# Altium PCB ADC_ArduinoDue_Shield.PcbDoc
Units mil, origin at the board's own origin, x right, y up, seen from the top; angles counter-clockwise.
Board outline 4010 x 2690 mil, 4 copper layers (Top Layer, PWR, GND, Bottom Layer), stack 21.709 mil thick; 29 components, 37 nets, 257 pads, 45 vias.
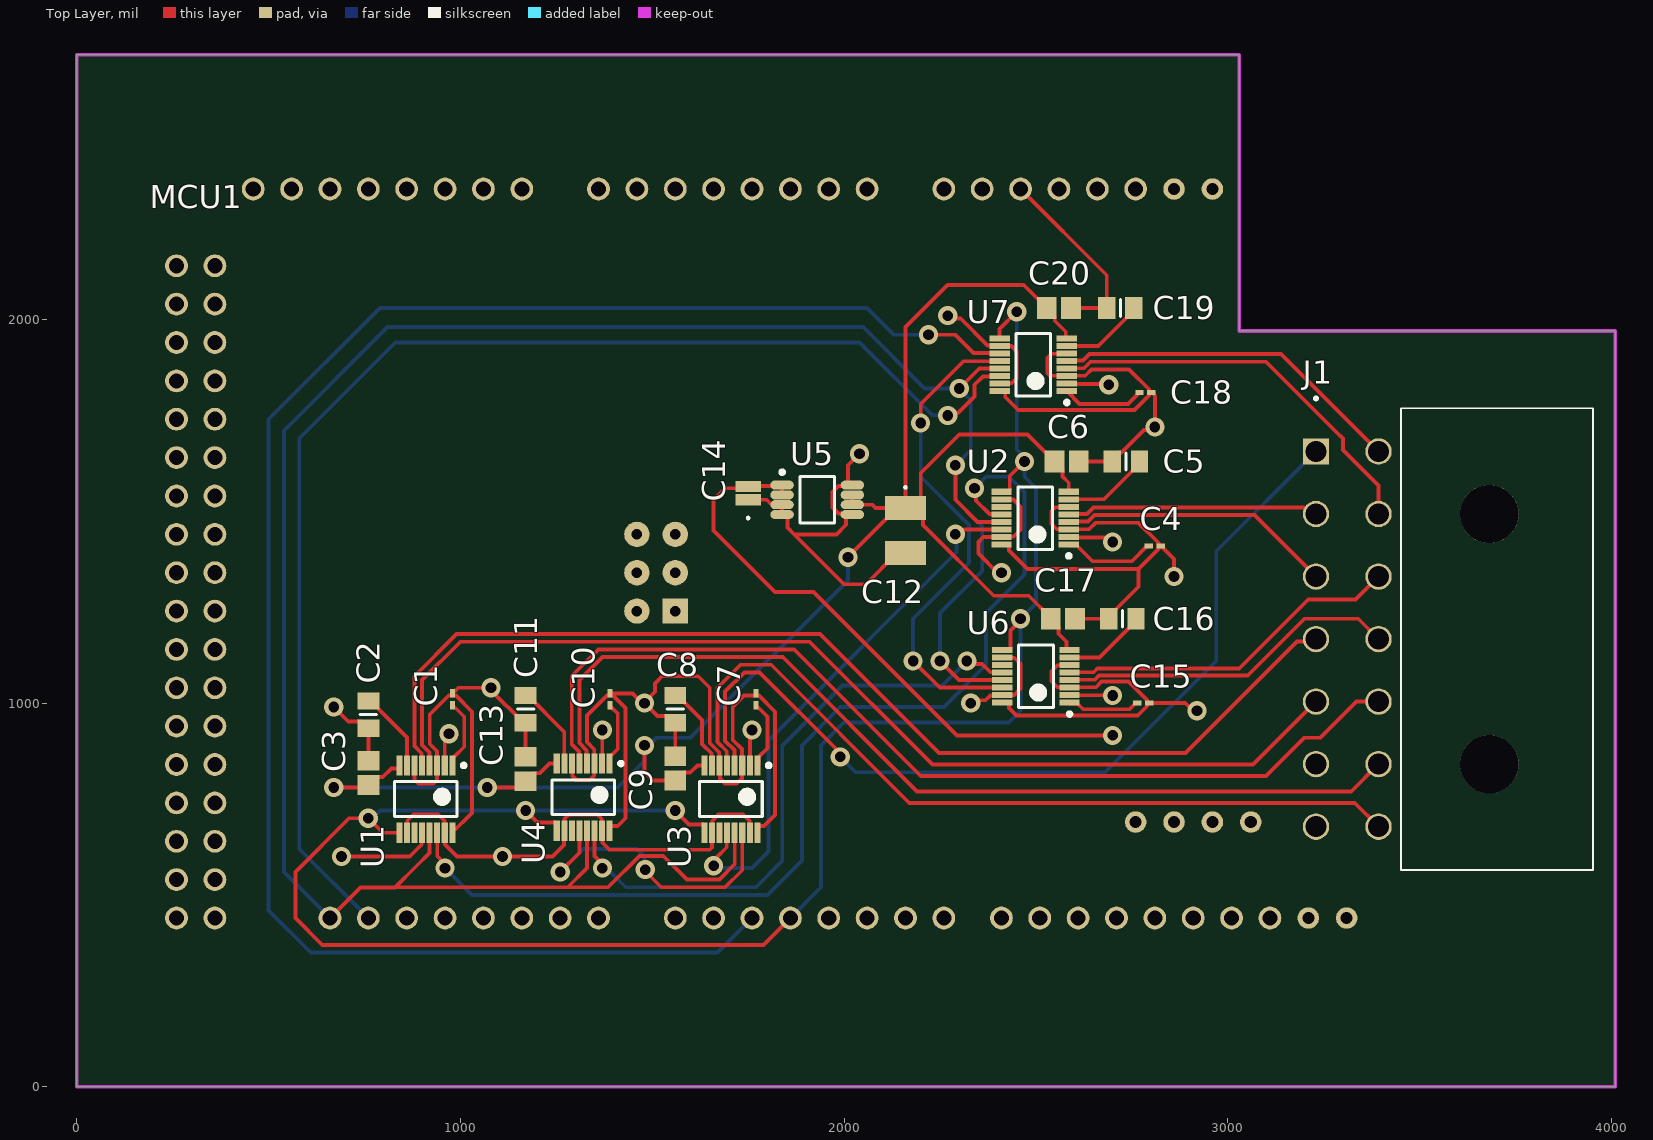
[diagram p0: Top Layer view]
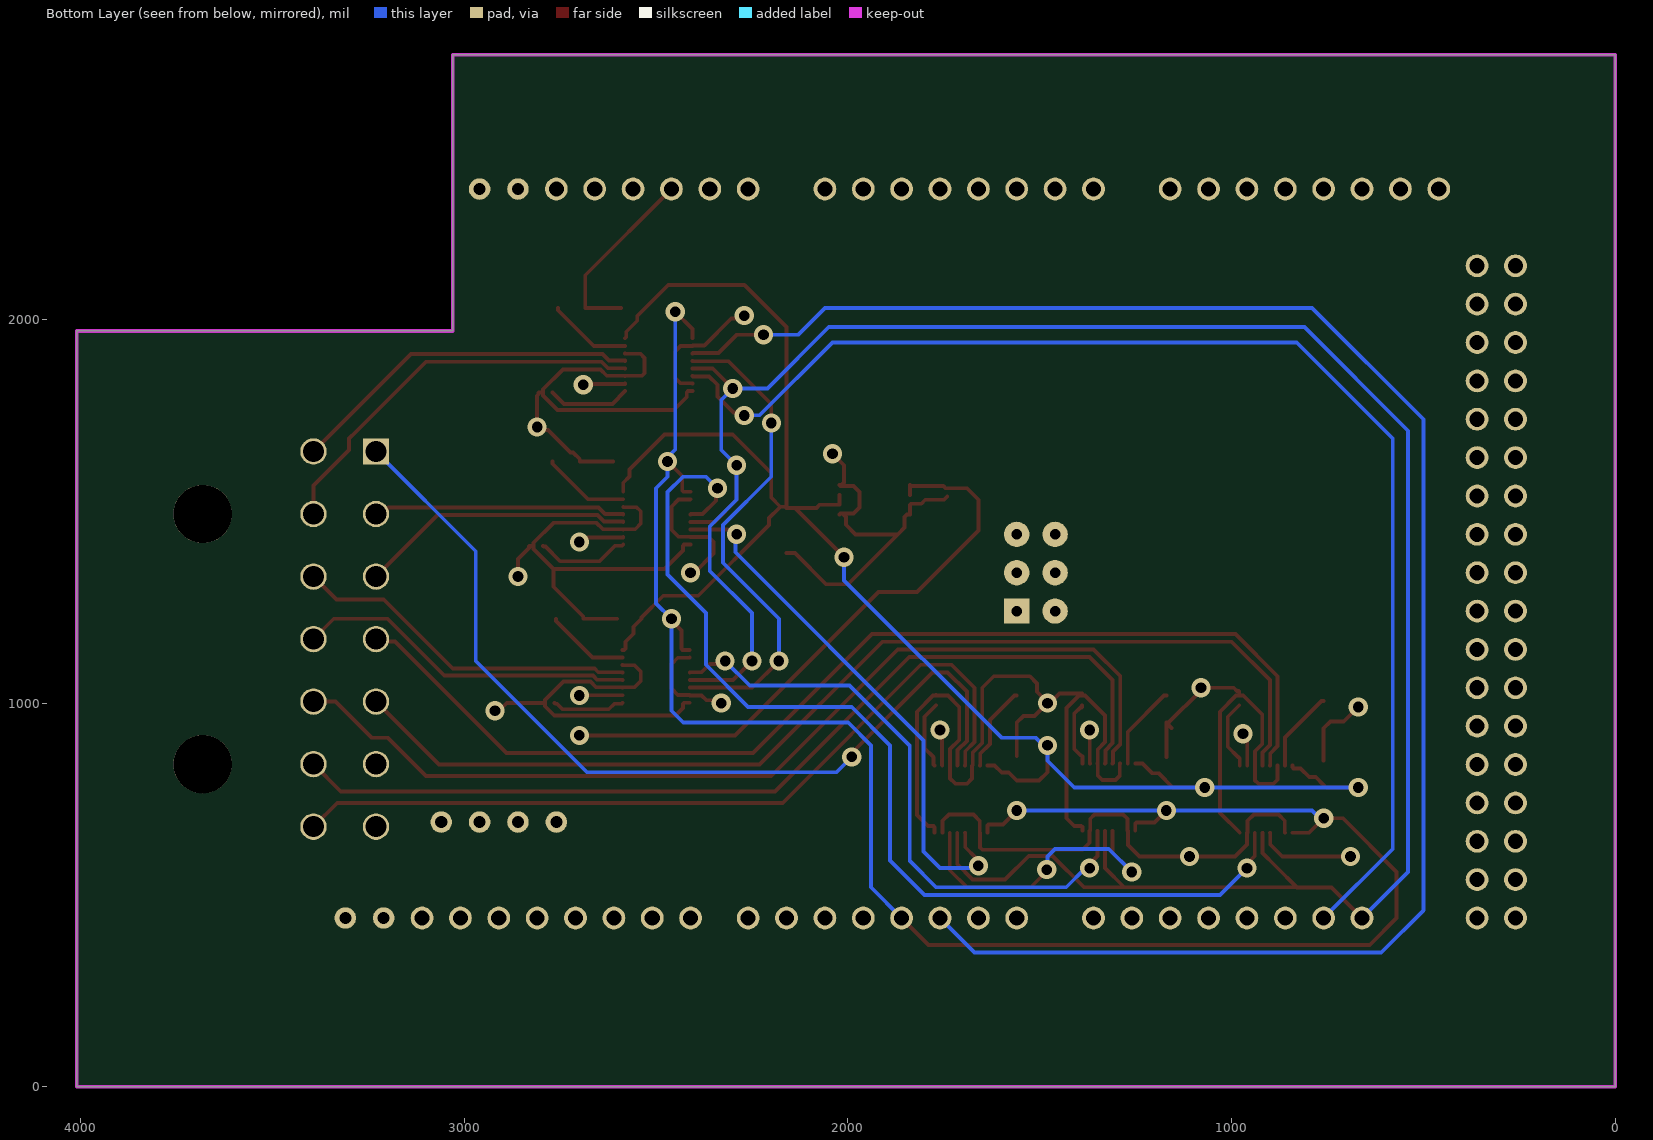
[diagram p1: Bottom Layer view, seen from below]
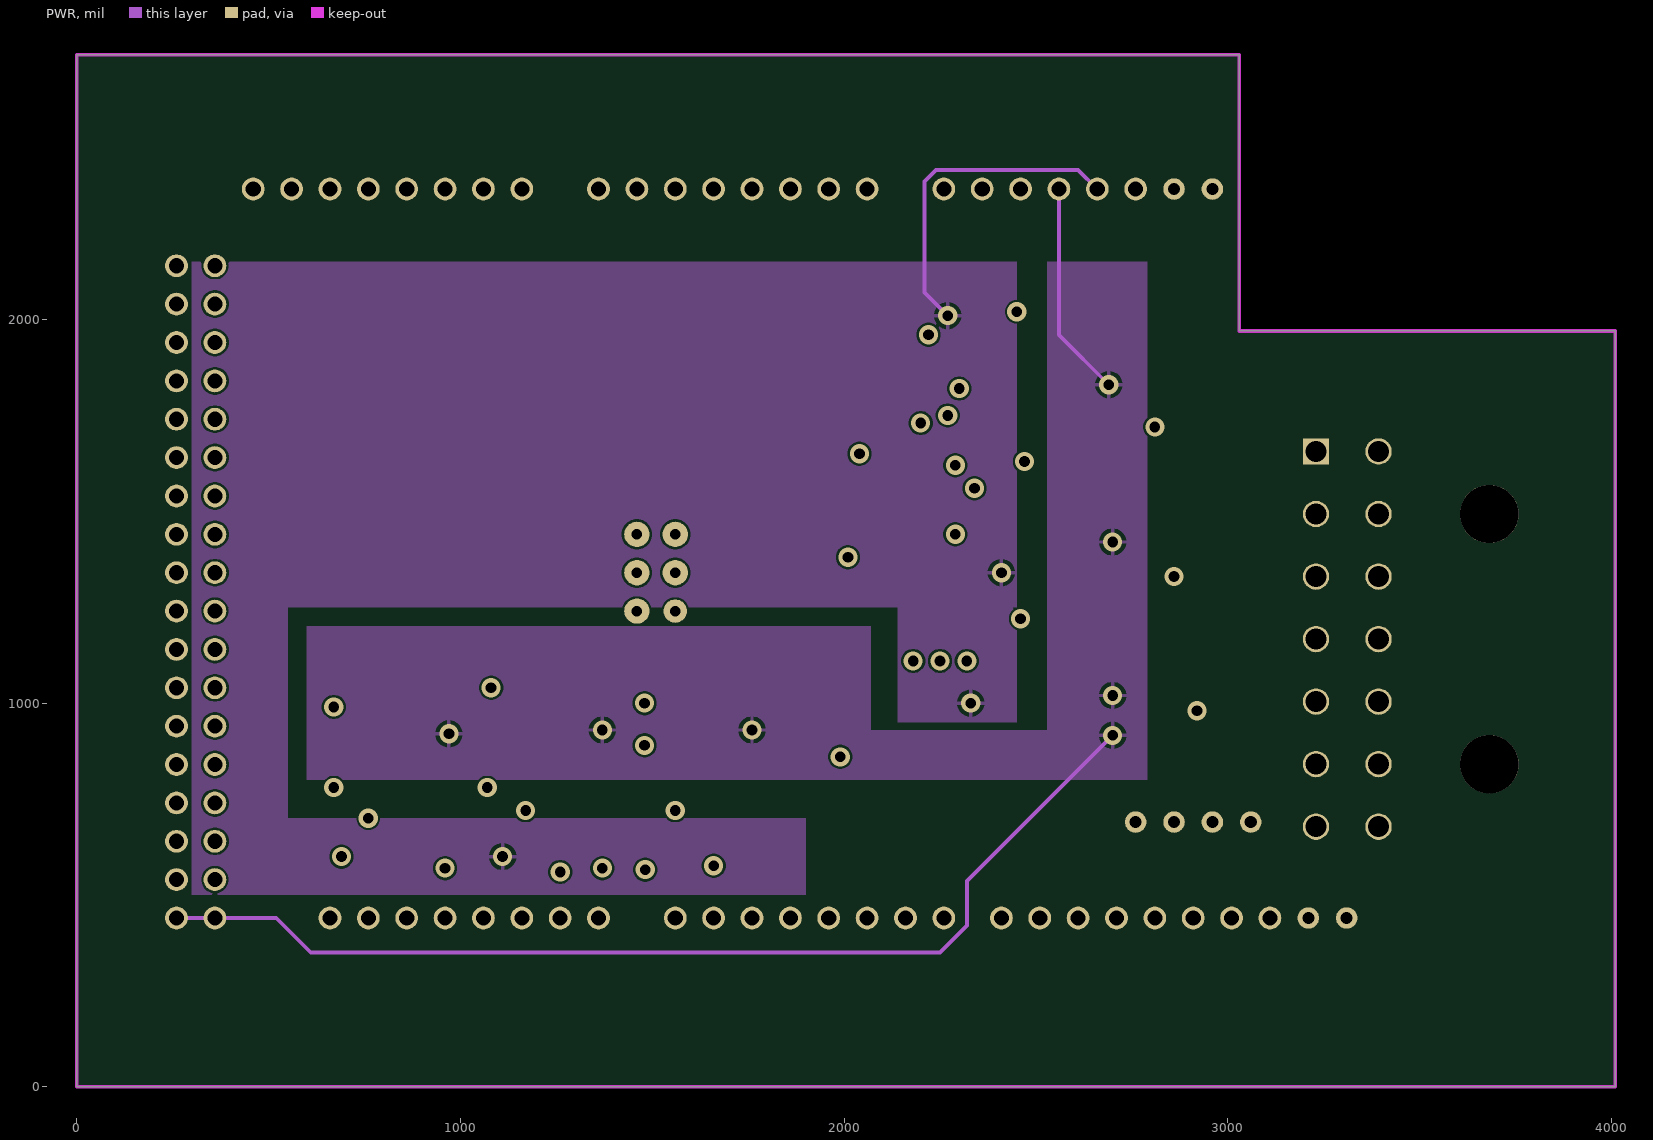
[diagram p2: PWR]
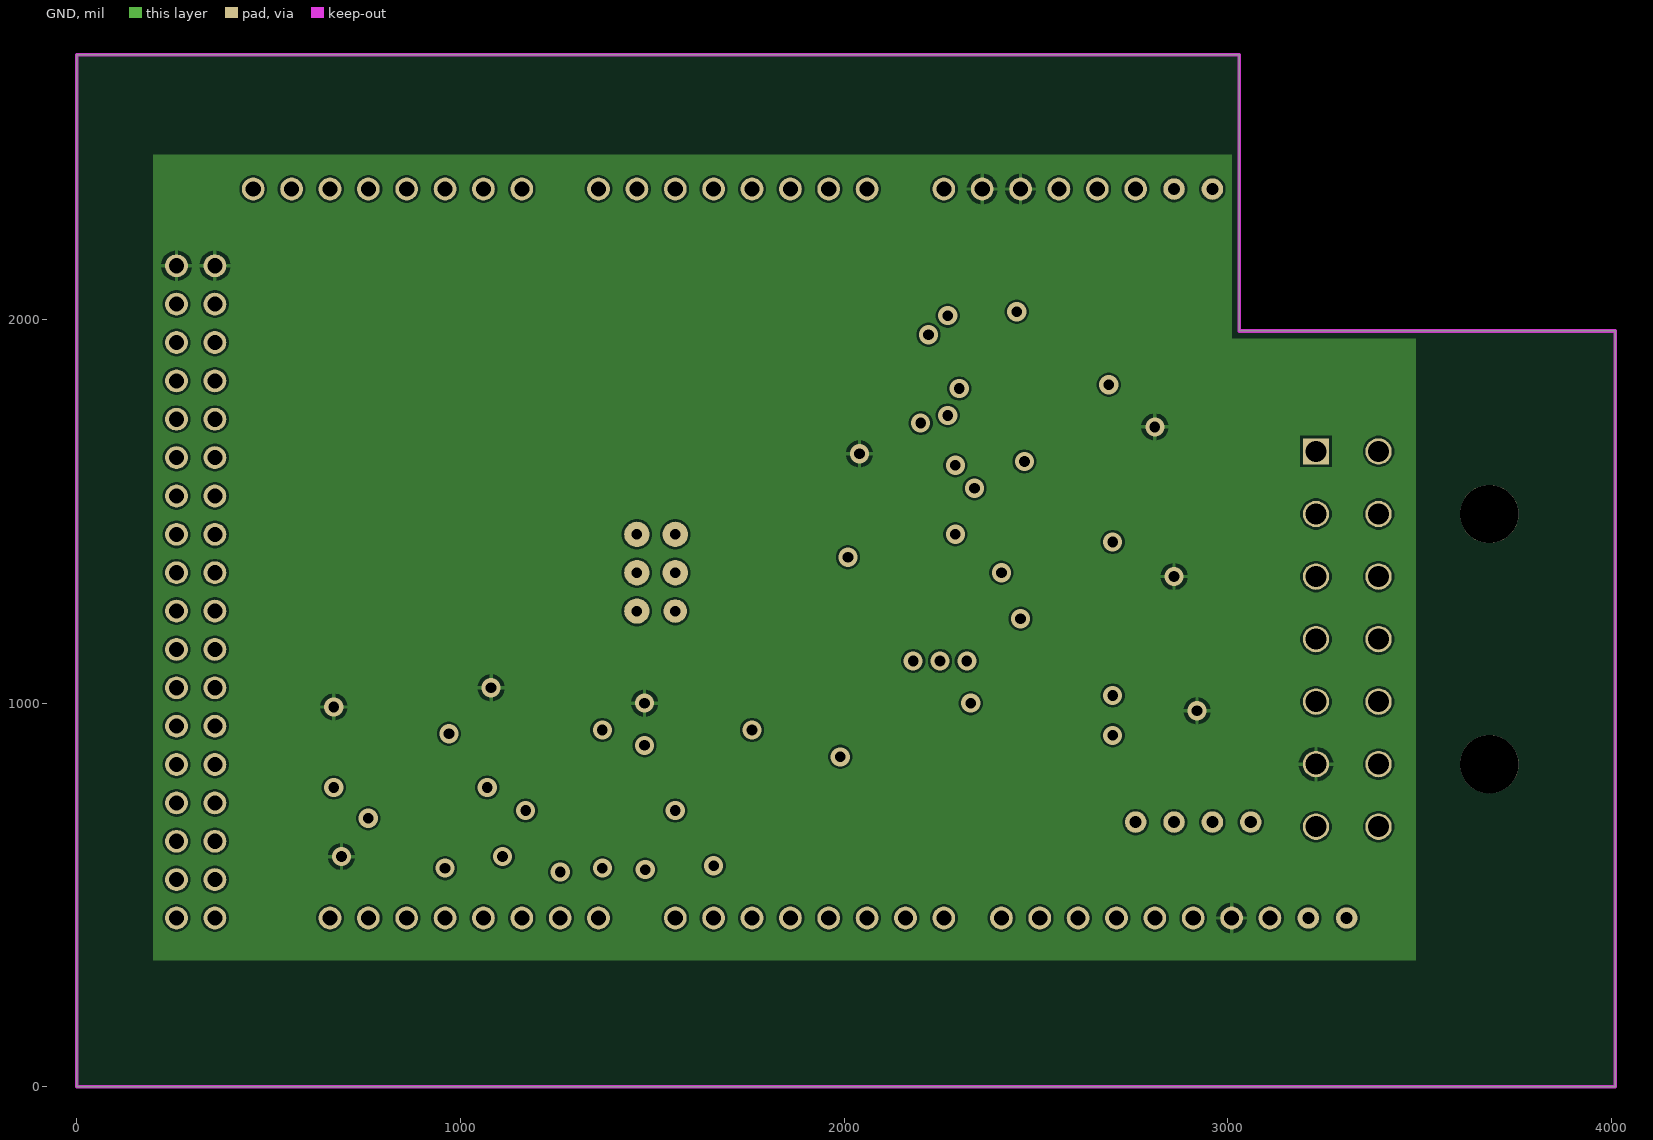
[diagram p3: GND]

## Layer stack, top to bottom
Top Solder: solder mask 0.4, Solder Resist, Dk 3.5
Top Layer: signal copper 1.4
Dielectric 2: prepreg 2.8, PP-006, Dk 4.1
PWR: signal copper 0.3543
Dielectric 1: dielectric 12.6, FR-4, Dk 4.8
GND: signal copper 0.3543
Dielectric 3: prepreg 2.8, PP-006, Dk 4.1
Bottom Layer: signal copper 1.4
Bottom Solder: solder mask 0.4, Solder Resist, Dk 3.5

## Board outline
0,0 4010,0 4010,1970 3030,1970 3030,2690 0,2690

## Design rules (kind name [scope] priority, off if disabled: settings)
Clearance [All] p1: gap=6 ignorepadtopadclearanceinfootprint=TRUE
ComponentClearance ComponentClearance_1 [InComponent('MCU1')] p1: gap=0 collisioncheckmode=3 verticalgap=0 showdistances=FALSE donotcheckwithout3dbody=TRUE
ComponentClearance [All] p2: gap=10 collisioncheckmode=3 verticalgap=10 showdistances=FALSE
PolygonConnect [All] p1: connectstyle=Relief reliefconductorwidth=10 reliefentries=4 polygonreliefangle="90 Angle" airgapwidth=10
RoutingVias [All] p1: holewidth=28 width=50 viastyle="Through Hole" minholewidth=28 minwidth=50 maxholewidth=28 maxwidth=50
SolderMaskExpansion [All] p1: expansion=4 istentingtop=FALSE
Width [All] p1: maxlimit=10 minlimit=10 preferedwidth=10
29 further rules are at their usual default settings.

## Components (designator, comment, footprint, x,y, rotation, side; value= is the part's Value field where it differs from the comment)
C1 "CL03A225MQ3CRNC" CAP_CL_03_SAM 980,1010 r270 top
C2 "CL21A476MQCLRNC" CAPC2012X140N 760,970 r270 top
C3 "C0805C275K8PACTU" CAPC220145_105N_KEM 760,818.39 r270 top
C4 "CL03A225MQ3CRNC" CAP_CL_03_SAM 2810,1410 r180 top
C5 "CL21A476MQCLRNC" CAPC2012X140N 2734.57,1630 r180 top
C6 "C0805C275K8PACTU" CAPC220145_105N_KEM 2580,1630 r180 top
C7 "CL03A225MQ3CRNC" CAP_CL_03_SAM 1770,1010 r270 top
C8 "CL21A476MQCLRNC" CAPC2012X140N 1560,984.57 r270 top
C9 "C0805C275K8PACTU" CAPC220145_105N_KEM 1560,830 r270 top
C10 "CL03A225MQ3CRNC" CAP_CL_03_SAM 1390,1010 r270 top
C11 "CL21A476MQCLRNC" CAPC2012X140N 1170,984.57 r270 top
C12 "25TQC5R6M" POSCAP_B1_B1S_B1G_B15G_B2_B2S 2160,1450 r270 top
C13 "C0805C275K8PACTU" CAPC220145_105N_KEM 1170,828.39 r270 top
C14 "AWK107BJ106MV-T" AWK107_0306_TAY 1750,1547.22 r90 top
C15 "CL03A225MQ3CRNC" CAP_CL_03_SAM 2780,1000 r180 top
C16 "CL21A476MQCLRNC" CAPC2012X140N 2725.43,1220 r180 top
C17 "C0805C275K8PACTU" CAPC220145_105N_KEM 2570,1220 r180 top
C18 "CL03A225MQ3CRNC" CAP_CL_03_SAM 2785.5,1810 r180 top
C19 "CL21A476MQCLRNC" CAPC2012X140N 2720,2030 r180 top
C20 "C0805C275K8PACTU" CAPC220145_105N_KEM 2560,2030 r180 top
J1 "Connector Header, 14-Position, 2 Rows, Male Pin" TE_1-770973-0 3230,1655.98 r90 top
MCU1 "DUE(NORMAL)" DUE(NORMAL) 1110,1640 r180 top locked
U1 "LTC2336HMS-18" TSSOP50P490X110-16N 910,750 r270 top
U2 "LTC2336HMS-18" TSSOP50P490X110-16N 2497.99,1482.05 r180 top
U3 "LTC2336HMS-18" TSSOP50P490X110-16N 1705,750 r270 top
U4 "LTC2336HMS-18" TSSOP50P490X110-16N 1320,755 r270 top
U5 "LTC6655CHMS8-1.25#PBF" TSOP65P490X110-8N 1930,1530 r0 top
U6 "LTC2336HMS-18" TSSOP50P490X110-16N 2500,1070 r180 top
U7 "LTC2336HMS-18" TSSOP50P490X110-16N 2492.99,1882.05 r180 top

## Footprints (in the part's own frame and the unit in brackets; to place one, negate y for a bottom-side part, rotate by r counter-clockwise, add the part's x,y. Pads: shape width x height; smd on the part's side, far side on the other; paste and mask are expansions set on the pad)
AWK107_0306_TAY [mil]
  rect 29x66.93 smd paste+0 mask+0: 1(-17.22,0) 2(17.22,0)
  silkscreen extent -68,-3 -62,3, body extent -18,-33 18,33, height 22
CAP_CL_03_SAM [mil]
  rect 22x13 smd paste+0 mask+0: 1(-15.5,0) 2(15.5,0)
  body extent -13,-6 13,6, height 13
CAPC2012X140N [mm]
  rect 1.15x1.45 smd: 1(-0.9,0) 2(0.9,0)
  silkscreen extent 0,-0.55 0,0.55
CAPC220145_105N_KEM [mm]
  rect 1.306x1.45 smd paste+0 mask+0: 1(-0.803,0) 2(0.803,0)
  body extent -1.1,-0.72 1.1,0.72, height 1.05
DUE(NORMAL) [mm]
  round 1.508 hole 1: 2(-16.51,30.48) 3(-19.05,30.48) 3V3(-39.37,-17.78) 4(-21.59,30.48) 5(-24.13,30.48) 5V(-36.83,-17.78) 5V_A(19.05,30.48) 5V_B(21.59,30.48) 6(-26.67,30.48) 7(-29.21,30.48) 8(-33.02,30.48) 9(-35.56,30.48) 10(-38.1,30.48) 11(-40.64,30.48) 12(-43.18,30.48) 13(-45.72,30.48) 22(19.05,27.94) 23(21.59,27.94) 24(19.05,25.4) 25(21.59,25.4) 26(19.05,22.86) 27(21.59,22.86) 28(19.05,20.32) 29(21.59,20.32) 30(19.05,17.78) 31(21.59,17.78) 32(19.05,15.24) 33(21.59,15.24) 34(19.05,12.7) 35(21.59,12.7) 36(19.05,10.16) 37(21.59,10.16) 38(19.05,7.62) 39(21.59,7.62) 40(19.05,5.08) 41(21.59,5.08) 42(19.05,2.54) 43(21.59,2.54) 44(19.05,0) 45(21.59,0) 46(19.05,-2.54) 47(21.59,-2.54) 48(19.05,-5.08) 49(21.59,-5.08) 50(19.05,-7.62) 51(21.59,-7.62) 52(19.05,-10.16) 53(21.59,-10.16) A0(-24.13,-17.78) A1(-21.59,-17.78) A2(-19.05,-17.78) A3(-16.51,-17.78) A4(-13.97,-17.78) A5(-11.43,-17.78) A6(-8.89,-17.78) A7(-6.35,-17.78) A8(-1.27,-17.78) A9(1.27,-17.78) A10(3.81,-17.78) A11(6.35,-17.78) AREF(-50.8,30.48) AREF1(-50.8,30.48) CANRX(13.97,-17.78) CANTX(16.51,-17.78) DAC0(8.89,-17.78) DAC1(11.43,-17.78) GND1(-48.26,30.48) GND_1(-34.29,-17.78) GND_2(-31.75,-17.78) GND_A(19.05,-12.7) GND_B(21.59,-12.7) RESET(-41.91,-17.78) RX0(-11.43,30.48) RX1(6.35,30.48) RX2(1.27,30.48) RX3(-3.81,30.48) SCL(11.43,30.48) SDA(8.89,30.48) TX0(-13.97,30.48) TX1(3.81,30.48) TX2(-1.27,30.48) TX3(-6.35,30.48) VIN(-29.21,-17.78)
  round 1.676 hole 0.7: 5V_ICSP(-8.89,5.08) GND_ICSP(-8.89,10.16) MOSI_ICSP(-8.89,7.62) RESET_ICSP(-11.43,5.08) SCK_ICSP(-11.43,7.62)
  round 1.422 hole 0.8: GND_DEBUG(-41.91,24.13) IOREF(-44.45,-17.78) NC(-46.99,-17.78) RESET_DEBUG(-49.53,24.13) SCL1(-55.88,30.48) SDA1(-53.34,30.48) SWCLK_DEBUG(-44.45,24.13) SWDIO_DEBUG(-46.99,24.13)
  rect 1.676x1.676 / inner round 1.549 / far side rect 1.676x1.676 hole 0.7: MISO_ICSP(-11.43,10.16)
POSCAP_B1_B1S_B1G_B15G_B2_B2S [mm]
  rect 1.6x2.7 smd: 1(-1.5,0) 2(1.5,0)
  silkscreen extent -2.9,-0.05 -2.8,0.05, body extent -1.75,-1.4 1.75,1.4, height 1.88
TE_1-770973-0 [mm]
  rect 1.75x1.75 hole 1.4: 1(0,0)
  round 1.75 hole 1.4: 2(-4.14,0) 3(-8.28,0) 4(-12.42,0) 5(-16.56,0) 6(-20.7,0) 7(-24.84,0) 8(0,-4.14) 9(-4.14,-4.14) 10(-8.28,-4.14) 11(-12.42,-4.14) 12(-16.56,-4.14) 13(-20.7,-4.14) 14(-24.84,-4.14)
  round 3.86 hole 3.86 unplated: ""(-20.7,-11.48) ""(-4.14,-11.48)
  silkscreen extent -27.7,-18.34 3.61,0.1
TSOP65P490X110-8N [mm] "TSOP, 8-Leads, Body 3.00x3.00mm, Pitch 0.65mm, IPC Medium Density"
  oval 1.55x0.6 smd: 1(-2.325,0.975) 2(-2.325,0.325) 3(-2.325,-0.325) 4(-2.325,-0.975) 5(2.325,-0.975) 6(2.325,-0.325) 7(2.325,0.325) 8(2.325,0.975)
  silkscreen extent -2.45,-1.55 1.15,1.95, body extent -1.55,-1.55 1.55,1.55, height 1.1
TSSOP50P490X110-16N [mm] "TSSOP, 16-Leads, Body 4.04x3.00mm, Pitch 0.50mm, IPC Medium Density"
  rect 1.35x0.4 smd: 1(-2.225,1.75) 2(-2.225,1.25) 3(-2.225,0.75) 4(-2.225,0.25) 5(-2.225,-0.25) 6(-2.225,-0.75) 7(-2.225,-1.25) 8(-2.225,-1.75) 9(2.225,-1.75) 10(2.225,-1.25) 11(2.225,-0.75) 12(2.225,-0.25) 13(2.225,0.25) 14(2.225,0.75) 15(2.225,1.25) 16(2.225,1.75)
  silkscreen extent -2.35,-2.08 1.15,2.63, body extent -1.55,-2.05 1.55,2.05, height 1.1

## Part data
C1 C4 C7 C10 C15 C18: "CL03 Series 0201 2.2 uF 6.3 V X5R ±20% Tolerance Multilayer Ceramic Capacitor", Capacitance=2.2uF, Case Code (Imperial)=0201, Case Code (Metric)=0603, Dielectric=X5R, Manufacturer=Samsung, Max Operating Temperature=85°C, Min Operating Temperature=-55°C, Supplier Part Number 1=1276-6870-1-ND, Tolerance=20%, Voltage Rating=6.3V, Case/Package=0201, Category="Ceramic Capacitors", ComponentLink1Description=https://datasheet.ciiva.com/26838/getdatasheetpartid-745303-26838096.pdf?src-supplier=Verical, ComponentLink1URL=https://datasheet.ciiva.com/26838/getdatasheetpartid-745303-26838096.pdf?src-supplier=Verical, Construction=Flat, Copyright="Copyright (C) 2022 Ultra Librarian. All rights reserved.", Depth=0.3mm, Digi-Key_Part_Number_1=1276-6870-2-ND, Digi-Key_Part_Number_2=1276-6870-1-ND, Digi-Key_Part_Number_3=1276-6870-6-ND, Height=0.3mm, Length=0.6mm, Manufacturer Part Number=CL03A225MQ3CRNC, Manufacturer_Part_Number=CL03A225MQ3CRNC, Mfr_Name=Samsung, Mount="Surface Mount", Packaging="Tape and Reel", Pricing 1="1=0.27000, 10=0.18500, 50=0.11080, 100=0.09360, 500=0.06406, 1000=0.05667, 2500=0.05421, 5000=0.04928 (USD)", Pricing 2="1=0.27000, 10=0.18500, 50=0.11080, 100=0.09360, 500=0.06406, 1000=0.05667, 2500=0.05421, 5000=0.04928 (USD)", Pricing 3="10000=0.04682, 20000=0.04435 (USD)", Pricing 4="1=0.29000, 10=0.13300, 50=0.13300, 100=0.10000, 1000=0.06100, 10000=0.04900 (USD)", Radiation Hardening=No, RefDes=RefDes, RoHS=Yes, RoHS Compliant=Yes, Series=CL, Stock 1=667406, Stock 2=667406, Stock 3=650000, Stock 4=295762, Supplier 1=Digi-Key, Supplier 2=Digi-Key, Supplier 3=Digi-Key, Supplier 4=Mouser, Supplier Part Number 2=1276-6870-6-ND, Supplier Part Number 3=1276-6870-2-ND, Supplier Part Number 4=187-CL03A225MQ3CRNC, Thickness=0.013inch, Type=DEV, Width=0.012inch
C2 C5 C8 C11 C16 C19: "Cap Ceramic 47uF 6.3V X5R 20% SMD 0805 85°C Paper T/R", Capacitance=47uF, Case Code (Imperial)=0805, Case Code (Metric)=2012, Dielectric=X5R, Manufacturer=Samsung, Max Operating Temperature=85°C, Min Operating Temperature=-55°C, Package="0805 Samsung", Package Quantity=4000, Supplier Part Number 1=1276-2420-1-ND, Tolerance=20%, Voltage Rating=6.3V, Availability=Unavailable, Case/Package=0805, Category="Ceramic Capacitors", ComponentLink1Description=https://datasheet.ciiva.com/25723/cl21a476mqclrnc-25723991.pdf?src-supplier=Digi-Key, ComponentLink1URL=https://datasheet.ciiva.com/25723/cl21a476mqclrnc-25723991.pdf?src-supplier=Digi-Key, Construction=Flat, Contact Plating=Tin, Depth=1.25mm, DigiKey-Purchase-URL=https://snapeda.com/shop?store=DigiKey&id=3598165, Lead Free="Lead Free", Length=2mm, Manufacturer Part Number=CL21A476MQCLRNC, MF=Samsung, Mount="Surface Mount", MP=CL21A476MQCLRNC, Packaging="Tape and Reel", Price=None, Pricing 1="1=0.49000, 10=0.34100, 50=0.23900, 100=0.20480, 500=0.15362, 1000=0.12973 (USD)", Pricing 2="1=0.49000, 10=0.34100, 50=0.23900, 100=0.20480, 500=0.15362, 1000=0.12973 (USD)", Pricing 3="4000=0.11607, 8000=0.10924 (USD)", Pricing 4="1=0.50000, 10=0.28500, 50=0.28500, 100=0.21700, 1000=0.13700, 10000=0.10800 (USD)", RoHS=Yes, RoHS Compliant=Yes, Series=CL, SnapEDA_Link=https://www.snapeda.com/parts/CL21A476MQCLRNC/Samsung/view-part/3598165/?ref=snap, Stock 1=98057, Stock 2=98057, Stock 3=98057, Stock 4=323, Supplier 1=Digi-Key, Supplier 2=Digi-Key, Supplier 3=Digi-Key, Supplier 4=Mouser, Supplier Part Number 2=1276-2420-6-ND, Supplier Part Number 3=1276-2420-2-ND, Supplier Part Number 4=187-CL21A476MQCLRNC, Termination=Wraparound, Thickness=0.037inch, Width=0.049inch
C3 C6 C9 C13 C17 C20: "0805 C 2.7uF Ceramic Multilayer Capacitor; 10 VDC; +85degC; X5R Dielec; +/-10%", Capacitance=2.7uF, Case Code (Imperial)=0805, Case Code (Metric)=2012, Dielectric=X5R, Dielectric Material=Ceramic, Manufacturer=KEMET, Max Operating Temperature=85°C, Mfr_Name=Kemet, Min Operating Temperature=-55°C, Package Quantity=1, Supplier Part Number 1=399-C0805C275K8PAC7800CT-ND, Tolerance=10%, Voltage=10V, Case/Package=0805, Category="Ceramic Capacitors", ComponentLink1Description=http://www.mouser.com/ds/2/212/KEM_C1006_X5R_SMD-1103249.pdf?src-supplier=Mouser, ComponentLink1URL=http://www.mouser.com/ds/2/212/KEM_C1006_X5R_SMD-1103249.pdf?src-supplier=Mouser, ComponentLink2Description=http://components.arrow.com/part/dataview/40912422S7467711N7429?src-supplier=Arrow+Electronics, ComponentLink2URL=http://components.arrow.com/part/dataview/40912422S7467711N7429?src-supplier=Arrow+Electronics, ComponentLink3Description=http://uk.rs-online.com/webdocs/13da/0900766b813da6d7.pdf?src-supplier=RSComponents, ComponentLink3URL=http://uk.rs-online.com/webdocs/13da/0900766b813da6d7.pdf?src-supplier=RSComponents, ComponentLink4Description=http://uk.rs-online.com/webdocs/13da/0900766b813da6d8.pdf?src-supplier=RSComponents, ComponentLink4URL=http://uk.rs-online.com/webdocs/13da/0900766b813da6d8.pdf?src-supplier=RSComponents, ComponentLink5Description=https://www.alliedelec.com/m/d/7f88201dbaab65c95b0b8234579261a3.pdf?src-supplier=Allied+Electronics, ComponentLink5URL=https://www.alliedelec.com/m/d/7f88201dbaab65c95b0b8234579261a3.pdf?src-supplier=Allied+Electronics, ComponentLink6Description=https://www.alliedelec.com/m/d/fc0aaf5de6140bfa85cbf42aaccfae41.pdf?src-supplier=Allied+Electronics, ComponentLink6URL=https://www.alliedelec.com/m/d/fc0aaf5de6140bfa85cbf42aaccfae41.pdf?src-supplier=Allied+Electronics, ComponentLink7Description=https://search.kemet.com/component-edge/download/datasheet/C0805C275K8PACTU.pdf?src-supplier=Digi-Key, ComponentLink7URL=https://search.kemet.com/component-edge/download/datasheet/C0805C275K8PACTU.pdf?src-supplier=Digi-Key, ComponentLink8Description=https://api.kemet.com/component-edge/download/datasheet/C0805C275K8PACTU.pdf?src-supplier=Digi-Key, ComponentLink8URL=https://api.kemet.com/component-edge/download/datasheet/C0805C275K8PACTU.pdf?src-supplier=Digi-Key, ComponentLink9Description=http://capacitoredge.kemet.com/capedge2/DataSheet?pn=C0805C275K8PAC7800&src-supplier=Avnet, ComponentLink9URL=http://capacitoredge.kemet.com/capedge2/DataSheet?pn=C0805C275K8PAC7800&src-supplier=Avnet, ComponentLink10Description=http://capacitoredge.kemet.com/capedge2/DataSheet?pn=C0805C275K8PAC7800&src-supplier=Avnet+Europe, ComponentLink10URL=http://capacitoredge.kemet.com/capedge2/DataSheet?pn=C0805C275K8PAC7800&src-supplier=Avnet+Europe, Construction=Flat, Copyright="Copyright (C) 2022 Ultra Librarian. All rights reserved.", Depth=1.25mm, Digi-Key_Part_Number_1=399-3127-1-ND, Digi-Key_Part_Number_2=399-3127-2-ND, Digi-Key_Part_Number_3=399-3127-6-ND, Dissipation Factor=5%, Height=3mm, Lead Free="Lead Free", Lead Pitch=0.75mm, Length=2mm, Manufacturer Part Number=C0805C275K8PACTU, Manufacturer_Part_Number=C0805C275K8PACTU, Mount="Surface Mount,PCB", Packaging="Tape and Reel", Pricing 1="1=0.51000, 10=0.36000, 50=0.27220, 100=0.23700, 500=0.17556, 1000=0.14923 (USD)", Pricing 2="1=0.51000, 10=0.36000, 50=0.27220, 100=0.23700, 500=0.17556, 1000=0.14923 (USD)", Pricing 3="4000=0.11970, 8000=0.11172 (USD)", Pricing 4="1=0.51000, 10=0.27300, 50=0.27300, 100=0.22400, 1000=0.14400, 10000=0.11100 (USD)", Radiation Hardening=No, REACH SVHC="No SVHC", RefDes=RefDes, RoHS=Yes, RoHS Compliant=Yes, Series=C, Stock 1=7603, Stock 2=7603, Stock 3=4000, Stock 4=6516, Supplier 1=Digi-Key, Supplier 2=Digi-Key, Supplier 3=Digi-Key, Supplier 4=Mouser, Supplier Part Number 2=399-C0805C275K8PAC7800DKR-ND, Supplier Part Number 3=399-C0805C275K8PAC7800TR-ND, Supplier Part Number 4=80-C0805C275K8P, Termination=SMD/SMT, Thickness=0.041inch, Type=DEV, Voltage Rating=10V, Voltage Rating (DC)=10V, Width=0.049inch
C12: "Cap Tant Solid 5.6uF 25V B2 CASE 20% (3.5 X 2.8 X 1.9mm) SMD 3528, B2 0.1 Ohm 105°C Embossed T/R", Capacitance=5.6uF, Case Code (Imperial)=1411, Case Code (Metric)=3528, ESR (Equivalent Series Resistance)=100mR, Leakage Current=42uA, Manufacturer=Panasonic, Max Operating Temperature=105°C, Min Operating Temperature=-55°C, Package Quantity=2000, Ripple Current=800mA, Supplier Part Number 1=P16518CT-ND, Tolerance=20%, Voltage=25V, Case/Package=1411, Category="Tantalum Capacitors", ComponentLink1Description=https://datasheet.ciiva.com/48675/aaa8000ce14-48675021.pdf?src-supplier=Avnet, ComponentLink1URL=https://datasheet.ciiva.com/48675/aaa8000ce14-48675021.pdf?src-supplier=Avnet, ComponentLink2Description=https://datasheet.ciiva.com/48543/tqc-series-eng-tds-48543112.pdf?src-supplier=Distrelec, ComponentLink2URL=https://datasheet.ciiva.com/48543/tqc-series-eng-tds-48543112.pdf?src-supplier=Distrelec, ComponentLink3Description=https://datasheet.ciiva.com/22745/1734368-22745228.pdf?src-supplier=Element14, ComponentLink3URL=https://datasheet.ciiva.com/22745/1734368-22745228.pdf?src-supplier=Element14, ComponentLink4Description=https://datasheet.ciiva.com/25785/1734368-25785141.pdf?src-supplier=Farnell, ComponentLink4URL=https://datasheet.ciiva.com/25785/1734368-25785141.pdf?src-supplier=Farnell, Datasheet Link=http://industrial.panasonic.com/cdbs/www-data/pdf/AAA8000/AAA8000C62.pdf, Depth=2.8mm, Dissipation Factor=10%, Features="General Purpose", Height=1.9mm, Height - Seated (Max)=0.079inch, Lead Free="Lead Free", Length=3.5mm, Life (Hours)=2000Hour, Manufacturer Part Number=25TQC5R6M, Manufacturer_Name=Panasonic, Manufacturer_Part_Number=25TQC5R6M, Mount="Surface Mount", Number of Pins=2, Packaging="Tape and Reel", Polarity=Polar, Pricing 1="1=2.01000, 10=1.58300, 50=1.37220, 100=1.18740, 500=0.89718, 1000=0.79162 (USD)", Pricing 2="1=2.01000, 10=1.58300, 50=1.37220, 100=1.18740, 500=0.89718, 1000=0.79162 (USD)", Pricing 3="2000=0.73885 (USD)", Pricing 4="1=1.77000, 10=1.27000, 50=1.27000, 100=1.08000, 1000=0.72000, 10000=0.67900 (USD)", Radiation Hardening=No, REACH SVHC="No SVHC", RoHS=Yes, RoHS Compliant=Yes, Stock 1=7710, Stock 2=7710, Stock 3=6000, Stock 4=2467, Supplier 1=Digi-Key, Supplier 2=Digi-Key, Supplier 3=Digi-Key, Supplier 4=Mouser, Supplier Part Number 2=P16518DKR-ND, Supplier Part Number 3=P16518TR-ND, Supplier Part Number 4=667-25TQC5R6M, Termination=SMD/SMT, Voltage Rating=25V, Voltage Rating (DC)=25V, Width=0.11inch
C14: "Multilayer Ceramic Capacitor 10uF 4V 20% 0306 Emboss T/R", Capacitance=10uF, Case Code (Imperial)=0306, Case Code (Metric)=0816, Manufacturer="Taiyo Yuden", Max Operating Temperature=85°C, Min Operating Temperature=-55°C, Supplier Part Number 1=587-5159-1-ND, Tolerance=20%, Voltage Rating=4V, Case/Package=0306, Category="Ceramic Capacitors", ComponentLink1Description="https://ds.yuden.co.jp/TYCOMPAS/ut/detail?pn=AWK107BJ106MV-T &amp;u=M&src-supplier=Digi-Key", ComponentLink1URL="https://ds.yuden.co.jp/TYCOMPAS/ut/detail?pn=AWK107BJ106MV-T &amp;u=M&src-supplier=Digi-Key", ComponentLink2Description=http://ds.yuden.co.jp/TYCOMPAS/ut/detail.do?productNo=AWK107BJ106MV-T&amp;fileName=AWK107BJ106MV-T_SS&amp;mode=specSheetDownload&src-supplier=Digi-Key, ComponentLink2URL=http://ds.yuden.co.jp/TYCOMPAS/ut/detail.do?productNo=AWK107BJ106MV-T&amp;fileName=AWK107BJ106MV-T_SS&amp;mode=specSheetDownload&src-supplier=Digi-Key, Copyright="Copyright (C) 2022 Ultra Librarian. All rights reserved.", Digi-Key_Part_Number_1=587-5159-1-ND, Digi-Key_Part_Number_2=587-5159-2-ND, Digi-Key_Part_Number_3=587-5159-6-ND, Manufacturer Part Number=AWK107BJ106MV-T, Manufacturer_Part_Number=AWK107BJ106MV-T, Mfr_Name="Taiyo Yuden", Mount="Surface Mount", Packaging="Cut Tape", Pricing 1="1=0.53000, 10=0.37700, 50=0.28480, 100=0.24810, 500=0.18376, 1000=0.15620 (USD)", Pricing 2="1=0.53000, 10=0.37700, 50=0.28480, 100=0.24810, 500=0.18376, 1000=0.15620 (USD)", Pricing 3="4000=0.13783 (USD)", Pricing 4="1=0.51000, 10=0.27300, 50=0.27300, 100=0.23800, 1000=0.15000, 10000=0.13100 (USD)", RefDes=RefDes, RoHS=Yes, RoHS Compliant=Yes, Stock 1=5653, Stock 2=5653, Stock 3=4000, Stock 4=3076, Supplier 1=Digi-Key, Supplier 2=Digi-Key, Supplier 3=Digi-Key, Supplier 4=Mouser, Supplier Part Number 2=587-5159-6-ND, Supplier Part Number 3=587-5159-2-ND, Supplier Part Number 4=963-AWK107BJ106MV-T, Type=DEV
J1: library part 1-770973-0, "Connector Header, 14-Position, 2 Rows, Male Pin, PCB, White, Mate-N-Lok Series", Color=White, Contact Current Rating=9.5A, Flammability Rating="UL94 V-0", Insulation Resistance=100MR, Manufacturer="TE Connectivity", Max Operating Temperature=221°C, Max Voltage Rating (AC)=600V, Min Operating Temperature=-67°C, Number of Power Positions=14, Package=None, Package Quantity=200, Supplier Part Number 1=A32482-ND, Test Voltage=1.5kV, Approvals=CSA, Availability=Unavailable, Category="Power Connectors", Circuit Application=Power, ComponentLink1Description=https://datasheet.ciiva.com/19460/1963239-19460794.pdf?src-supplier=Jameco, ComponentLink1URL=https://datasheet.ciiva.com/19460/1963239-19460794.pdf?src-supplier=Jameco, ComponentLink2Description=https://datasheet.ciiva.com/1111/eng-cd-770973-g-1111842.pdf?src-supplier=Element14, ComponentLink2URL=https://datasheet.ciiva.com/1111/eng-cd-770973-g-1111842.pdf?src-supplier=Element14, ComponentLink3Description=https://datasheet.ciiva.com/710/eng-cd-770973-h-710742.pdf?src-supplier=Digi-Key, ComponentLink3URL=https://datasheet.ciiva.com/710/eng-cd-770973-h-710742.pdf?src-supplier=Digi-Key, ComponentLink4Description=https://datasheet.ciiva.com/16654/eng-cs-82181-softshell-high-density-0408-16654873.pdf?src-supplier=Avnet+Europe, ComponentLink4URL=https://datasheet.ciiva.com/16654/eng-cs-82181-softshell-high-density-0408-16654873.pdf?src-supplier=Avnet+Europe, Connector System=Wire-to-Board, Connector Type=Pin, Contact Gender=Male, Contact Material=Brass, Contact Plating=Tin, Contact Retention="No (Without)", Contact Type="Male Pin", Current Rating=9.5A, Fastening Type=Ramp, Height=11.86mm, Housing Color=White, Housing Material=Nylon, Length=30.56mm, Manufacturer Part Number=1-770973-0, Mating Alignment="Yes (With)", Mating Retention="Yes (With)", MF="{'manufacturer': 'TE Connectivity'}", Mount="Through Hole,Board", MP=1-770973-0, Number of Contacts=14, Number of Poles=14, Number of Ports=1, Number of Positions=14, Number of Rows=2, Number of Terminals/Pins=14, Orientation="Right Angle", Packaging=Bag, PCB Mount Alignment="No (Without)", PCB Mount Retention=With, PCB Thickness=1.57inch, Pitch=0.162inch, Plating Thickness=8.89um, Price=None, Pricing 1="1=6.69000, 10=6.05100, 100=5.29790, 500=4.46140, 1000=3.90372 (USD)", Pricing 2="1=6.19000, 10=5.42000, 25=5.24000, 50=5.07000, 100=4.89000, 250=4.38000 (USD)", Pricing 3="1=6.37000, 10=5.58000, 50=5.58000, 100=5.05000, 200=4.51000, 600=4.24000, 1000=3.71000, 2600=3.53000, 5000=3.45000, 10000=3.36000 (USD)", Radiation Hardening=No, REACH SVHC=Unknown, RoHS=Yes, RoHS Compliant=Yes, Row Spacing=0.163inch, Sealable="No (Without)", Series="Mini-Universal MATE-N-LOK", Stock 1=583, Stock 2=272, Stock 3=1677, Strain Relief="No (Without)", Supplier 1=Digi-Key, Supplier 2=Newark, Supplier 3=Mouser, Supplier Part Number 2=52K3387, Supplier Part Number 3=571-1-770973-0, Termination=Solder, VDE Tested=Yes, Voltage Rating=600V, Width=12.7mm
MCU1: "Mcu, Arduino Due, 32-BIT Cortex- M3 Arm, 96MHZ, 256K, 50K, 5 Spi", Case/Package=Module, Manufacturer=Arduino, Manufacturer Part Number=A000062, Package Quantity=1, Supplier Part Number 1=1050-1049-ND, Category="Embedded Processors and Controllers", ComponentLink1Description=https://datasheet.ciiva.com/12069/arduinodue-216811-12069710.pdf?src-supplier=Mouser, ComponentLink1URL=https://datasheet.ciiva.com/12069/arduinodue-216811-12069710.pdf?src-supplier=Mouser, ComponentLink2Description=https://datasheet.ciiva.com/14100/due-eng-tds-14100428.pdf?src-supplier=Distrelec, ComponentLink2URL=https://datasheet.ciiva.com/14100/due-eng-tds-14100428.pdf?src-supplier=Distrelec, ComponentLink3Description=https://datasheet.ciiva.com/6205/arduinoduebrd-web-6205279.pdf?src-supplier=Digi-Key, ComponentLink3URL=https://datasheet.ciiva.com/6205/arduinoduebrd-web-6205279.pdf?src-supplier=Digi-Key, ComponentLink4Description=https://datasheet.ciiva.com/19455/2170222-19455450.pdf?src-supplier=Jameco, ComponentLink4URL=https://datasheet.ciiva.com/19455/2170222-19455450.pdf?src-supplier=Jameco, ComponentLink5Description=https://datasheet.ciiva.com/20168/73-4445-20168553.pdf?src-supplier=Rapid+Electronics, ComponentLink5URL=https://datasheet.ciiva.com/20168/73-4445-20168553.pdf?src-supplier=Rapid+Electronics, ComponentLink6Description=https://datasheet.ciiva.com/6810/1682211-6810793.pdf?src-supplier=Newark, ComponentLink6URL=https://datasheet.ciiva.com/6810/1682211-6810793.pdf?src-supplier=Newark, ComponentLink7Description=https://datasheet.ciiva.com/7647/1682211-7647597.pdf?src-supplier=Element14, ComponentLink7URL=https://datasheet.ciiva.com/7647/1682211-7647597.pdf?src-supplier=Element14, Core Architecture=ARM, DeviceSetName=DUE(NORMAL), Evaluation Kit=Yes, GateName_1=G$1, Height=0.05inch, Length=4.5inch, LibraryName=DUElib130425, Number of Bits=32, Package=DUE(NORMAL), Pricing 1="1=40.30000 (USD)", Pricing 2="1=40.30000, 10=40.30000, 50=40.30000, 100=40.30000, 1000=40.30000, 10000=40.30000 (USD)", REACH SVHC=Unknown, RoHS=Yes, Series=AT91SAM3, Stock 1=7059, Stock 2=901, Supplier 1=Digi-Key, Supplier 2=Mouser, Supplier Part Number 2=782-A000062, SymbolName_1=DUE(NORMAL), Weight=0.09lb, Width=2inch
U1 U2 U3 U4 U6 U7: "1-Channel Single ADC SAR 250ksps 18-bit Serial Automotive 16-Pin MSOP Tube", Case/Package=MSOP, Manufacturer="Analog Devices / Linear Technology", Manufacturer Part Number=LTC2336HMS-18#PBF, Max Operating Temperature=125°C, Max Supply Voltage=5.25V, Min Operating Temperature=-40°C, Min Supply Voltage=4.75V, Nominal Supply Current=5.5mA, Package Quantity=37, Supplier Part Number 1=505-LTC2336HMS-18#PBF-ND, Category="Analog to Digital Converters (ADCs)", ComponentLink1Description=https://datasheet.ciiva.com/31394/1753492-31394758.pdf?src-supplier=Farnell, ComponentLink1URL=https://datasheet.ciiva.com/31394/1753492-31394758.pdf?src-supplier=Farnell, ComponentLink2Description=https://datasheet.ciiva.com/29654/43771-29654171.pdf?src-supplier=Digi-Key, ComponentLink2URL=https://datasheet.ciiva.com/29654/43771-29654171.pdf?src-supplier=Digi-Key, ComponentLink3Description=https://datasheet.ciiva.com/28464/1753492-28464969.pdf?src-supplier=Element14, ComponentLink3URL=https://datasheet.ciiva.com/28464/1753492-28464969.pdf?src-supplier=Element14, Interface=SPI, Number of A/D Converters=1, Number of Bits=18, Number of Inputs=1, Number of Pins=16, Packaging=Rail/Tube, Pricing 1="1=51.57000, 10=48.11400, 25=46.09720, 100=44.84700 (USD)", REACH SVHC="No SVHC", Resolution=18b, RoHS=Yes, RoHS Compliant=Yes, Sampling Rate=250000S/s, Stock 1=51, Supplier 1=Digi-Key
U5: library part LTC6655, "V-Ref Precision 1.25V 5mA Automotive 8-Pin MSOP (test to see if this pushes to cloud)", Case/Package=MSOP, Manufacturer="Analog Devices / Linear Technology", Max Operating Temperature=125°C, Max Output Voltage=1.25V, Min Operating Temperature=-40°C, Nominal Supply Current=5mA, Package Quantity=50, Quiescent Current=7mA, Supplier Part Number 1=584-C6655CHMS81.25PF, Temperature Coefficient=5ppm/°C, Tolerance=0.05%, Category="Voltage Regulators - Linear", ComponentLink1Description=https://datasheet.ciiva.com/2006/28576-2006051.pdf?src-supplier=Digi-Key, ComponentLink1URL=https://datasheet.ciiva.com/2006/28576-2006051.pdf?src-supplier=Digi-Key, ComponentLink2Description=https://datasheet.ciiva.com/14152/ltc6655-eng-ds-14152023.pdf?src-supplier=Distrelec, ComponentLink2URL=https://datasheet.ciiva.com/14152/ltc6655-eng-ds-14152023.pdf?src-supplier=Distrelec, Manufacturer Part Number=LTC6655CHMS8-1.25#PBF, Mount="Surface Mount", Number of Channels=1, Number of Pins=8, Output Current=5mA, Output Voltage=1.25V, Packaging=Rail/Tube, Pricing 1="1=9.85000, 10=8.73000, 50=8.32000, 100=7.22000, 250=6.90000, 1000=6.90000, 10000=6.90000 (USD)", Reference Type=Series, RoHS=Yes, RoHS Compliant=Yes, Series=-, Stock 1=586, Supplier 1=Mouser, Supply Current=5mA

## Via types
v1: diameter 50, hole 28, Top Layer to Bottom Layer, 45 vias

## Nets (pads, with @x,y where several pads share a name; then routed paths per layer and width w, separated by ;. In a path a pad name is that pad's centre, name@x,y a point inside that pad or via, vN(x,y) a via of type N, cw(c..) or ccw(c..) an arc to the next point about the centre after c; other vN are vias at no path point)
+1.25V: C3.2 C6.2 C9.2 C12.1 C13.2 C17.2 C20.2 U1.8 U2.8 U3.8 U4.8 U5.6 U5.7 U6.8 U7.8 | length 4884.2
  Top Layer w10: v1(670,780) 753.21,780 C3.2 780.7,807.49 797.49,807.49 820,830 838.23,830 841.1,832.87 U1.8 ; v1(1070,780) 1153.21,780 1190.7,817.49 1207.49,817.49 1232.6,842.6 U4.8 ; v1(1480,890) 1480,820 1501.61,798.39 C9.2 1580.7,819.09 1599.09,819.09 1617.6,837.6 U3.8 ; v1(2010,1380.35) 2010,1380.71 C12.1@2138.35,1509.06 ; U5.7 U5.6 2073.81,1517.2 2081.96,1509.06 C12.1@2138.35,1509.06 ; C12.1@2160,1508.91 2160,1980 2270,2090 2468.39,2090 C20.2 2549.09,2009.3 2549.09,1996.76 2577.9,1967.96 2577.9,1953.64 U7.8 ; C12.1 C12.1@2138.35,1509.06 ; C12.1@2162.07,1512.07 2176.21,1512.07 2199.69,1535.55 2199.69,1599.69 2300,1700 2478.39,1700 C6.2 2569.09,1609.3 2569.09,1590.91 2585.59,1574.41 U2.8 ; C12.1@2178.98,1509.06 2205.47,1482.56 2205.47,1464.53 2390,1280 2481.24,1280 2538.39,1222.84 C17.2 2559.09,1199.3 2559.09,1180.91 2580,1160 2580,1141.77 2582.87,1138.9 U6.8
  Bottom Layer w10: v1(670,780) v1(1070,780) 1410,780 1480,850 v1(1480,890) 1490.82,890 1510.82,910 1600,910 2010,1320 v1(2010,1380.35)
+3V3: MCU1.3V3 U1.10 U1.15 U2.10 U2.15 U3.10 U3.15 U4.10 U4.15 U6.10 U6.15 U7.10 U7.15 | length 3099.1
  Top Layer w10: U1.10 861.6,663.21 861.6,693.53 878.07,710 941.93,710 958.4,693.53 958.4,663.21 960.02,661.59 960.02,631.27 991.29,600 v1(1110,600) 1240,600 1269.98,629.98 1269.98,666.59 1271.6,668.21 1271.6,698.53 1283.07,710 1356.93,710 1368.4,698.53 1368.4,668.21 U4.15 1370.02,666.59 1370.02,636.27 1388.29,618 1649.93,618 1655.79,623.86 U3.10 1656.6,663.21 1656.6,693.53 1673.07,710 1736.93,710 1753.4,693.53 1753.4,663.21 U3.15 ; v1(2270,2010) 2277.65,2002.35 2303.99,2002.35 2374.26,1932.07 2404.58,1932.07 U7.10 2406.2,1930.45 2436.52,1930.45 2450,1916.97 2450,1847.12 2436.52,1833.65 2406.2,1833.65 U7.15 ; v1(2330,1000) 2337.65,1007.65 2368.95,1007.65 2381.27,1019.98 2411.59,1019.98 U6.15 2413.21,1021.6 2443.53,1021.6 2460,1038.07 2460,1101.93 2443.53,1118.4 2413.21,1118.4 U6.10 ; v1(2410,1340) 2400,1340 2350,1390 2350,1420 2362.83,1432.83 U2.15 2411.2,1433.65 2441.52,1433.65 2460,1452.12 2460,1511.97 2441.52,1530.45 2411.2,1530.45 U2.10
  PWR w10: v1(2270,2010) 2210,2070 2210,2360 2240,2390 2610,2390 MCU1.3V3
+5V: C14.2 MCU1.5V MCU1.5V_A MCU1.5V_B U1.2 U2.2 U3.2 U4.2 U5.1 U5.2 U6.2 U7.2 | length 5517.1
  Top Layer w10: U1.2 959.21,898.39 970,909.18 v1(970,920) ; U4.2 1369.61,842.99 1369.61,929.61 v1(1370,930) ; U3.2 1755.02,838.41 1755.02,925.02 v1(1760,930) ; U5.2 U5.1 1836.49,1566.41 1751.98,1566.41 C14.2 1745.57,1560 1690,1560 1660,1530 1660,1450 1820,1290 1920,1290 2294,916 v1(2700,916) ; U7.2 2581.4,1832.02 2687.98,1832.02 v1(2690,1830) ; U2.2 2586.4,1432.02 2677.15,1432.02 2689.18,1420 v1(2700,1420) ; U6.2 2699.21,1020.79 v1(2700,1020)
  PWR w10: MCU1.5V_B MCU1.5V_A 520,440 610,350 2250,350 2320,420 2320,536 v1(2700,916) ; MCU1.5V 2560,1960 v1(2690,1830)
GND: C1.1 C2.2 C3.1 C4.1 C5.2 C6.1 C7.1 C8.2 C9.1 C10.1 C11.2 C12.2 C13.1 C14.1 C15.1 C16.2 C17.1 C18.1 C19.2 C20.1 J1.6 MCU1.GND1 MCU1.GND_1 MCU1.GND_2 MCU1.GND_A MCU1.GND_B U1.3 U1.6 U1.12 U1.16 U2.3 U2.6 U2.16 U3.3 U3.6 U3.16 U4.3 U4.6 U4.16 U5.3 U5.4 U5.5 U5.8 U6.3 U6.6 U6.16 U7.3 U7.6 U7.16 | length 8686
  Top Layer w10: v1(670,990) 707.8,952.2 742.36,952.2 C2.2 C3.1 ; v1(690,600) 868.08,600 899.35,631.27 899.35,661.59 U1.12 ; U1.6 880.47,800.47 890.94,790 930,790 938.72,798.72 938.72,836.79 U1.3 938.72,838.41 938.72,874.61 920,893.33 920,970 969.5,1019.5 978.5,1019.5 C1.1@980,1021 ; U1.16 1030,713.5 1030,977.56 988.06,1019.5 981.5,1019.5 C1.1@980,1021 ; C11.2@1156.37,935.5 C11.2 ; C13.1 C11.2 ; U4.6 1291.28,841.79 1291.28,811.47 1302.75,800 1337.25,800 1348.72,811.47 1348.72,841.79 U4.3 1348.72,843.41 1348.72,879.61 1330,898.33 1330,967.56 1381.94,1019.5 1388.5,1019.5 C10.1@1390,1021 ; U4.16 1388.9,677.13 1391.77,680 1410,680 1430,700 1430,987.56 1398.06,1019.5 1391.5,1019.5 C10.1@1390,1021 ; C9.1 C8.2 1542.36,966.77 1513.23,966.77 v1(1480,1000) ; C14.1@1741.07,1538.93 C14.1 1798.46,1530 1808.65,1519.81 1835.86,1519.81 U5.3 U5.4 1845.87,1491.61 1852.17,1485.32 1852.17,1457.83 1870,1440 ; U3.16 1773.9,676.54 1776.77,679.42 1790.91,679.42 1820,708.5 1820,977.56 1778.06,1019.5 1771.5,1019.5 1770,1021 1768.5,1019.5 1739.5,1019.5 1710,990 1710,904.22 1733.72,880.5 1733.72,838.41 U3.3 1733.72,836.79 1733.72,803.72 1720,790 1690,790 1676.28,803.72 1676.28,836.79 1674.66,838.41 1674.66,871.67 1650,896.33 1650,1040 1620,1070 1525.86,1070 1506.76,1050.9 1506.76,1029.81 1480,1003.06 v1(1480,1000) ; U5.5@2011.1,1491.61 2004.8,1485.32 2004.8,1464.8 1980,1440 1870,1440 ; U5.5 2018.93,1494.22 1985.78,1494.22 1970,1510 1970,1550 1985.78,1565.78 2018.93,1565.78 U5.8 2016.29,1568.39 2010,1574.68 2010,1620 v1(2040,1650) ; C12.2 2138.35,1390.94 2057.4,1310 2000,1310 1870,1440 ; U7.16 2417.13,1813.15 2420,1810.28 2420,1798.07 2454.07,1764 2757.06,1764 2795,1801.94 2795,1808.5 C18.1@2796.5,1810 ; U2.16 2427.13,1413.15 2430,1410.28 2430,1398.07 2478.07,1350 2767.56,1350 ; U6.16 2427.13,1001.1 2430,998.23 2430,987.04 2449.04,968 2765.56,968 2789.5,991.94 2789.5,998.5 C15.1@2791,1000 ; MCU1.GND_1@2465,2340 MCU1.GND_1 2684.57,2115.43 C19.2 C20.1 ; U7.6 2579.78,1910.76 2540.76,1910.76 2530,1900 2530,1860 2536.67,1853.33 2579.78,1853.33 U7.3 2581.4,1853.33 2628.59,1853.33 2645.25,1870 2743.06,1870 2795,1818.06 2795,1811.5 C18.1@2796.5,1810 ; U2.6 2584.78,1510.76 2550.76,1510.76 2540,1500 2540,1467.79 2554.46,1453.33 2584.78,1453.33 U2.3 2586.4,1453.33 2638.59,1453.33 2655.25,1470 2767.56,1470 2819.5,1418.06 2819.5,1411.5 C4.1@2821,1410 ; U6.6 2586.79,1098.72 2556.47,1098.72 2540,1082.25 2540,1057.75 2556.47,1041.28 2586.79,1041.28 U6.3 2588.41,1041.28 2656.54,1041.28 2671.25,1056 2741.56,1056 2789.5,1008.06 2789.5,1001.5 C15.1@2791,1000 ; C17.1 C16.2 2690,1225.91 2767.56,1303.46 2767.56,1350 ; C6.1 C5.2 2699.13,1635.91 2716.77,1653.54 2722.68,1653.54 2781.48,1712.35 2802.35,1712.35 v1(2810,1720) 2810,1801 2807,1804 2807,1808.5 2805.5,1810 C18.1 C18.1@2796.5,1810 ; v1(2860,1330) 2860,1375.5 2831.5,1404 2831.5,1408.5 2830,1410 C4.1 C4.1@2821,1410 ; v1(2920,980) 2909.18,980 2889.18,1000 C15.1 C15.1@2791,1000 ; C1.1@980,1021 980,1030 981.5,1031.5 986,1031.5 994.5,1040 v1(1080,1040) 1080,1033.23 1164.09,949.13 C11.2 ; C10.1@1390,1021 C10.1 1448.93,1025.5 1474.43,1000 v1(1480,1000) ; 2767.56,1350 2819.5,1401.94 2819.5,1408.5 C4.1@2821,1410
NetC1_2: C1.2 U1.1 | length 182.9
  Top Layer w10: U1.1 978.9,856.3 981.77,859.17 982.93,859.17 1010,886.24 1010,964.5 C1.2
NetC2_1: C2.1 U1.7 | length 213
  Top Layer w10: C2.1 765.91,1005.43 860.79,910.55 U1.7
NetC4_2: C4.2 U2.1 | length 243.4
  Top Layer w10: U2.1 2588.46,1410.28 2607.17,1410.28 2647.44,1370 2750,1370 2788.5,1408.5 2793,1408.5 C4.2
NetC5_1: C5.1 U2.7 | length 228.8
  Top Layer w10: U2.7 2677.17,1531.26 2770,1624.09 C5.1
NetC7_2: C7.2 U3.1 | length 180.1
  Top Layer w10: C7.2 1800,964.5 1800,882.4 1776.77,859.17 1776.77,840.47 U3.1
NetC8_1: C8.1 U3.7 | length 225.5
  Top Layer w10: C8.1 1565.91,1020 1630,955.91 1630,893.71 1654.98,868.73 1654.98,838.41 U3.7
NetC10_2: C10.2 U4.1 | length 171.9
  Top Layer w10: U4.1 1388.9,861.3 1391.77,864.17 1394.14,864.17 1410,880.03 1410,972.64 1394.14,988.5 1391.5,988.5 1390,990 C10.2
NetC11_1: C11.1 U4.7 | length 222.6
  Top Layer w10: C11.1 1175.91,1020 1270.79,925.12 U4.7
NetC15_2: C15.2 U6.1 | length 190.6
  Top Layer w10: U6.1 2590.47,998.23 2609.17,998.23 2623.4,984 2744,984 2758.5,998.5 2763,998.5 C15.2
NetC16_1: C16.1 U6.7 | length 218.5
  Top Layer w10: U6.7 2665.98,1119.21 2760.87,1214.09 C16.1
NetC18_2: C18.2 U7.1 | length 215.6
  Top Layer w10: U7.1 2613.74,1780 2740,1780 C18.2
NetC19_1: C19.1 U7.7 | length 219.2
  Top Layer w10: U7.7 2662.6,1931.26 2755.43,2024.09 C19.1
NetJ1_1: J1.1 U3.4 | length 2390.8
  Top Layer w10: U3.4 1714.03,838.41 1714.03,877.56 1690,901.59 1690,1030 1740,1080 1780,1080 1990,870 v1(1990,860)
  Bottom Layer w10: v1(1990,860) 2030,820 2680,820 2970,1110 2970,1395.98 J1.1
NetJ1_2: J1.2 U2.5 | length 659
  Top Layer w10: U2.5 2586.4,1492.7 2632.7,1492.7 2650,1510 3197.05,1510 3214.06,1492.99 J1.2
NetJ1_3: J1.3 U2.4 | length 718.1
  Top Layer w10: U2.4 2586.4,1473.02 2635.64,1473.02 2652.63,1490 3070,1490 J1.3
NetJ1_4: J1.4 U1.5 | length 2887.7
  Top Layer w10: U1.5 899.35,838.41 899.35,868.73 880,888.08 880,1070 990,1180 1937.37,1180 2247.37,870 2890,870 3180.55,1160.55 3223.54,1160.55 J1.4
NetJ1_5: J1.5 U1.4 | length 2802.5
  Top Layer w10: U1.4 919.03,838.41 919.03,871.67 900,890.7 900,1060 1000,1160 1910,1160 2230,840 3065.98,840 J1.5
NetJ1_8: J1.8 U7.5 | length 925.1
  Top Layer w10: U7.5 2581.4,1892.7 2622.7,1892.7 2640,1910 3138.98,1910 J1.8
NetJ1_9: J1.9 U7.4 | length 1045.1
  Top Layer w10: U7.4 2581.4,1873.02 2625.64,1873.02 2642.63,1890 3100,1890 3281.2,1708.8 3300,1690 3300,1660 3392.99,1567.01 J1.9
NetJ1_10: J1.10 U6.5 | length 909
  Top Layer w10: U6.5 2588.41,1080.65 2650.65,1080.65 2660,1090 3030,1090 3210,1270 3332.99,1270 J1.10
NetJ1_11: J1.11 U6.4 | length 893.6
  Top Layer w10: U6.4 2588.41,1060.97 2653.6,1060.97 2664.63,1072 3052,1072 3200,1220 3340,1220 J1.11
NetJ1_12: J1.12 U4.5 | length 2584.8
  Top Layer w10: U4.5 1309.35,843.41 1309.35,873.73 1290,893.08 1290,1070 1360,1140 1870,1140 2200,810 3100,810 3200,910 3241.52,910 3335.54,1004.02 J1.12
NetJ1_13: J1.13 U4.4 | length 2507.9
  Top Layer w10: U4.4 1329.03,843.41 1329.03,876.67 1310,895.7 1310,1060 1370,1120 1840,1120 2190,770 3321.97,770 J1.13
NetJ1_14: J1.14 U3.5 | length 2135.5
  Top Layer w10: U3.5 1694.35,838.41 1694.35,874.61 1670,898.96 1670,1040 1730,1100 1810,1100 2170,740 3331.02,740 J1.14
NetMCU1_2: MCU1.2 U7.11 | length 4697.4
  Top Layer w10: v1(2220,1960) 2290,1960 2337.61,1912.39 2404.58,1912.39 U7.11
  Bottom Layer w10: MCU1.2 1670,350 610,350 500,460 500,1740 790,2030 2060,2030 2130,1960 v1(2220,1960)
NetMCU1_3: MCU1.3 U1.9 U2.9 U3.9 U4.9 U6.9 U7.9 | length 5277.4
  Top Layer w10: U1.9 797.6,662.4 v1(760,700) 710,700 570,560 570,440 640,370 1790,370 MCU1.3 ; v1(1170,720) 1201.02,688.98 1248.23,688.98 1251.1,686.1 U4.9 ; v1(1560,720) 1596.02,683.98 1633.23,683.98 1636.1,681.1 U3.9 ; U7.9 2405.39,1975.39 v1(2450,2020) ; U2.9 2429.09,1550.94 2431.97,1553.82 2431.97,1591.97 v1(2470,1630) ; U6.9 2431.1,1138.9 2433.98,1141.77 2433.98,1189.46 2460,1215.48 v1(2460,1220)
  Bottom Layer w10: v1(760,700) 770.82,700 790.82,720 v1(1170,720) v1(1560,720) ; MCU1.3 1940,520 1940,890 1999.13,949.13 2429.13,949.13 2460,980 v1(2460,1220) 2500,1260 2500,1560 2470,1590 v1(2470,1630) 2470,1640.82 2450,1660.82 v1(2450,2020)
NetMCU1_SCL: MCU1.SCL U1.13 U2.13 U3.13 U4.13 U6.13 U7.13 | length 6210.2
  Top Layer w10: MCU1.SCL 739.75,519.75 829.75,519.75 885,575 919.03,609.03 919.03,661.59 U1.13 ; 830,520 1279.68,520 ; U4.13 1329.84,570.16 1279.68,520 ; U3.13 1714.84,579.93 1674.91,540 1590.63,540 1528.63,602 1466.8,602 1384.8,520 1279.68,520 ; v1(2250,1110) 2299.84,1060.16 U6.13 ; v1(2290,1620) 2290,1530 2347.8,1472.2 U2.13 ; v1(2300,1820) 2352.2,1872.2 U7.13
  Bottom Layer w10: MCU1.SCL 540,560 540,1710 810,1980 2050,1980 2210,1820 v1(2300,1820) 2330,1790 2330,1660 v1(2290,1620) 2290,1530 2360,1460 2360,1344.73 2250,1234.73 v1(2250,1110)
NetMCU1_SDA: MCU1.SDA U7.14 | length 3392.8
  Top Layer w10: v1(2270,1750) 2277.65,1757.65 2298.57,1757.65 2340,1799.09 2340,1830 2361.71,1851.71 2404.58,1851.71 U7.14
  Bottom Layer w10: MCU1.SDA 580,620 580,1690 830,1940 2040.46,1940 2230,1750.46 2269.54,1750.46 v1(2270,1750)
NetU1_14: U1.14 U2.12 | length 2729.6
  Top Layer w10: U1.14 939.53,601.3 960,580.82 v1(960,570) ; v1(2340,1560) 2344.27,1555.73 2344.27,1527.7 2379.26,1492.7 2409.58,1492.7 U2.12
  Bottom Layer w10: v1(960,570) 1030,500 1800,500 1890,590 1890,890 1990,990 2260,990 2370,1100 2370,1235 2470,1335 2470,1550 2430,1590 2370,1590 v1(2340,1560)
NetU2_14: U2.14 U3.12 | length 1421.3
  Top Layer w10: v1(1660,576) 1667.65,583.65 1667.65,597.65 1694.35,624.35 1694.35,661.59 U3.12 ; v1(2290,1440) 2300.82,1440 2313.34,1452.52 U2.14
  Bottom Layer w10: v1(1660,576) 1666,570 1760,570 1803,613 1803,903 2293.33,1393.33 2293.33,1436.67 v1(2290,1440)
NetU3_14: U3.14 U4.12 | length 806.7
  Top Layer w10: v1(1260,560) 1310.08,610.08 1310.08,667.32 U4.12 ; v1(1481.72,566) 1481.72,561.72 1523.43,520 1690,520 1734.53,564.53 U3.14
  Bottom Layer w10: v1(1260,560) 1320,620 1460,620 1479.86,600.14 1479.86,567.86 v1(1481.72,566)
NetU4_14: U4.14 U6.12 | length 1601.6
  Top Layer w10: U4.14 1349.53,601.3 1370,580.82 v1(1370,570) ; v1(2320,1110) 2327.65,1102.35 2359.58,1102.35 2381.27,1080.65 2411.59,1080.65 U6.12
  Bottom Layer w10: v1(1370,570) 1380.82,570 1430.82,520 1770,520 1838.63,588.63 1838.63,888.63 1996,1046 2256,1046 v1(2320,1110)
NetU6_14: U6.14 U7.12 | length 1296
  Top Layer w10: v1(2180,1110) 2249.53,1040.47 U6.14 ; v1(2199.54,1730) 2200,1730.46 2200,1780 2311.08,1891.08 2404.58,1891.08 U7.12
  Bottom Layer w10: v1(2180,1110) 2180,1220 2326,1366 2326,1464 2200,1590 2200,1729.54 v1(2199.54,1730)
pads on no net: J1. J1.7 MCU1.4 MCU1.5 MCU1.5V_ICSP MCU1.6 MCU1.7 MCU1.8 MCU1.9 MCU1.10 MCU1.11 MCU1.12 MCU1.13 MCU1.22 MCU1.23 MCU1.24 MCU1.25 MCU1.26 MCU1.27 MCU1.28 MCU1.29 MCU1.30 MCU1.31 MCU1.32 MCU1.33 MCU1.34 MCU1.35 MCU1.36 MCU1.37 MCU1.38 MCU1.39 MCU1.40 MCU1.41 MCU1.42 MCU1.43 MCU1.44 MCU1.45 MCU1.46 MCU1.47 MCU1.48 MCU1.49 MCU1.50 MCU1.51 MCU1.52 MCU1.53 MCU1.A0 MCU1.A1 MCU1.A2 MCU1.A3 MCU1.A4 MCU1.A5 MCU1.A6 MCU1.A7 MCU1.A8 MCU1.A9 MCU1.A10 MCU1.A11 MCU1.AREF MCU1.AREF1 MCU1.CANRX MCU1.CANTX MCU1.DAC0 MCU1.DAC1 MCU1.GND_DEBUG MCU1.GND_ICSP MCU1.IOREF MCU1.MISO_ICSP MCU1.MOSI_ICSP MCU1.NC MCU1.RESET MCU1.RESET_DEBUG MCU1.RESET_ICSP MCU1.RX0 MCU1.RX1 MCU1.RX2 MCU1.RX3 MCU1.SCK_ICSP MCU1.SCL1 MCU1.SDA1 MCU1.SWCLK_DEBUG MCU1.SWDIO_DEBUG MCU1.TX0 MCU1.TX1 MCU1.TX2 MCU1.TX3 MCU1.VIN U1.11 U2.11 U3.11 U4.11 U6.11

## Polygon pours and split planes (outlines as drawn)
+5V on PWR "+5V_L02_P008" (solid, pour order 8): 2060,800 2550,800 2550,930 2060,930
+3V3 on PWR "+3V3_L02_P007" (solid, remove dead copper, pour order 7): 2450,1250 2450,950 2140,950 2140,1250
+5V on PWR "+5V_L02_P002" (solid, remove dead copper, pour order 2): 600,1200 600,800 2070,800 2070,1200
+5V on PWR "+5V_L02_P003" (solid, remove dead copper, pour order 3): 2530,2150 2790,2150 2790,800 2530,800
+3V3 on PWR "+3V3_L02_P004" (solid, remove dead copper, pour order 4): 2450,2150 2450,1250 300,1250 300,2150
+3V3 on PWR "+3V3_L02_P005" (solid, remove dead copper, pour order 5): 300,1250 550,1250 550,700 1900,700 1900,500 300,500
GND on GND "GND_L03_P006" (solid, pour order 6): 200,2430 3010,2430 3010,1950 3490,1950 3490,330 200,330

## Keep-outs
Keep-Out Layer:
  the board outline again, w10

## Text inside footprints (layer, text, board x,y; h text height)
MCU1: Mechanical 7 "RESET" at 3085,765 h77.5 r90; Mechanical 7 "SWDIO" at 2985,765 h77.5 r90; Mechanical 7 "SWCLK" at 2885,765 h77.5 r90; Mechanical 7 "GND" at 2785,765 h77.5 r90; Mechanical 7 "GND" at 1385,1465 h77.5 r180; Mechanical 7 "5V" at 1385,1265 h77.5 r180; Mechanical 7 "RESET" at 1635,1415 h77.5; Mechanical 7 "MOSI" at 1385,1365 h77.5 r180; Mechanical 7 "SCK" at 1635,1315 h77.5; Mechanical 7 "MISO" at 1635,1215 h77.5; Mechanical 7 "SCL1" at 3285,365 h77.5 r270; Mechanical 7 "SDA1" at 3185,365 h77.5 r270; Mechanical 7 "IOref" at 2885,2415 h77.5 r90; Mechanical 7 "Gnd" at 185,2165 h77.5 r180; Mechanical 7 "53" at 185,2065 h77.5 r180; Mechanical 7 "51" at 185,1965 h77.5 r180; Mechanical 7 "49" at 185,1865 h77.5 r180; Mechanical 7 "47" at 185,1765 h77.5 r180; Mechanical 7 "45" at 185,1665 h77.5 r180; Mechanical 7 "43" at 185,1565 h77.5 r180; Mechanical 7 "41" at 185,1465 h77.5 r180; Mechanical 7 "39" at 185,1365 h77.5 r180; Mechanical 7 "37" at 185,1265 h77.5 r180; Mechanical 7 "35" at 185,1165 h77.5 r180; Mechanical 7 "33" at 185,1065 h77.5 r180; Mechanical 7 "31" at 185,965 h77.5 r180; Mechanical 7 "29" at 185,865 h77.5 r180; Mechanical 7 "27" at 185,765 h77.5 r180; Mechanical 7 "25" at 185,665 h77.5 r180; Mechanical 7 "23" at 185,565 h77.5 r180; Mechanical 7 "5v" at 185,465 h77.5 r180; Mechanical 7 "Gnd" at 435,2115 h77.5; Mechanical 7 "52" at 435,2015 h77.5; Mechanical 7 "50" at 435,1915 h77.5; Mechanical 7 "48" at 435,1815 h77.5; Mechanical 7 "46" at 435,1715 h77.5; Mechanical 7 "44" at 435,1615 h77.5; Mechanical 7 "42" at 435,1515 h77.5; Mechanical 7 "40" at 435,1415 h77.5; Mechanical 7 "38" at 435,1315 h77.5; Mechanical 7 "36" at 435,1215 h77.5; Mechanical 7 "34" at 435,1115 h77.5; Mechanical 7 "32" at 435,1015 h77.5; Mechanical 7 "30" at 435,915 h77.5; Mechanical 7 "28" at 435,815 h77.5; Mechanical 7 "26" at 435,715 h77.5; Mechanical 7 "24" at 435,615 h77.5; Mechanical 7 "22" at 435,515 h77.5; Mechanical 7 "5v" at 435,415 h77.5; Mechanical 7 "SDA(20)" at 735,365 h77.5 r270; Mechanical 7 "SCL(21)" at 635,365 h77.5 r270; Mechanical 7 "Rx1(19)" at 835,365 h77.5 r270; Mechanical 7 "Tx1(18)" at 935,365 h77.5 r270; Mechanical 7 "Rx2(17)" at 1035,365 h77.5 r270; Mechanical 7 "Tx2(16)" at 1135,365 h77.5 r270; Mechanical 7 "Rx3(15)" at 1235,365 h77.5 r270; Mechanical 7 "Tx3(14)" at 1335,365 h77.5 r270; Mechanical 7 "Rx0" at 1535,365 h77.5 r270; Mechanical 7 "Tx0" at 1635,365 h77.5 r270; Mechanical 7 "2" at 1735,365 h77.5 r270; Mechanical 7 "3" at 1835,365 h77.5 r270; Mechanical 7 "4" at 1935,365 h77.5 r270; Mechanical 7 "5" at 2035,365 h77.5 r270; Mechanical 7 "6" at 2135,365 h77.5 r270; Mechanical 7 "7" at 2235,365 h77.5 r270; Mechanical 7 "8" at 2385,365 h77.5 r270; Mechanical 7 "9" at 2485,365 h77.5 r270; Mechanical 7 "10" at 2585,365 h77.5 r270; Mechanical 7 "11" at 2685,365 h77.5 r270; Mechanical 7 "12" at 2785,365 h77.5 r270; Mechanical 7 "13" at 2885,365 h77.5 r270; Mechanical 7 "Gnd" at 2985,365 h77.5 r270; Mechanical 7 "Aref" at 3085,365 h77.5 r270; Mechanical 7 "cnTX" at 485,2415 h77.5 r90; Mechanical 7 "cnRX" at 585,2415 h77.5 r90; Mechanical 7 "DAC1" at 685,2415 h77.5 r90; Mechanical 7 "DAC0" at 785,2415 h77.5 r90; Mechanical 7 "A11" at 885,2415 h77.5 r90; Mechanical 7 "A10" at 985,2415 h77.5 r90; Mechanical 7 "A9" at 1085,2415 h77.5 r90; Mechanical 7 "A8" at 1185,2415 h77.5 r90; Mechanical 7 "A7" at 1385,2415 h77.5 r90; Mechanical 7 "A6" at 1485,2415 h77.5 r90; Mechanical 7 "A5" at 1585,2415 h77.5 r90; Mechanical 7 "A4" at 1685,2415 h77.5 r90; Mechanical 7 "A3" at 1785,2415 h77.5 r90; Mechanical 7 "A2" at 1885,2415 h77.5 r90; Mechanical 7 "A1" at 1985,2415 h77.5 r90; Mechanical 7 "A0" at 2085,2415 h77.5 r90; Mechanical 7 "Vin" at 2285,2415 h77.5 r90; Mechanical 7 "Gnd" at 2385,2415 h77.5 r90; Mechanical 7 "Gnd" at 2485,2415 h77.5 r90; Mechanical 7 "5v" at 2585,2415 h77.5 r90; Mechanical 7 "3v3" at 2685,2415 h77.5 r90; Mechanical 7 "Rst" at 2785,2415 h77.5 r90